# Altium PCB hot_board.PcbDoc
Units mm, origin at the board's own origin, x right, y up, seen from the top; angles counter-clockwise.
Board outline 74 x 58.5 mm, 2 copper layers (Top Layer, Bottom Layer), stack 1.579 mm thick; 50 components, 30 nets, 168 pads, 16 vias.
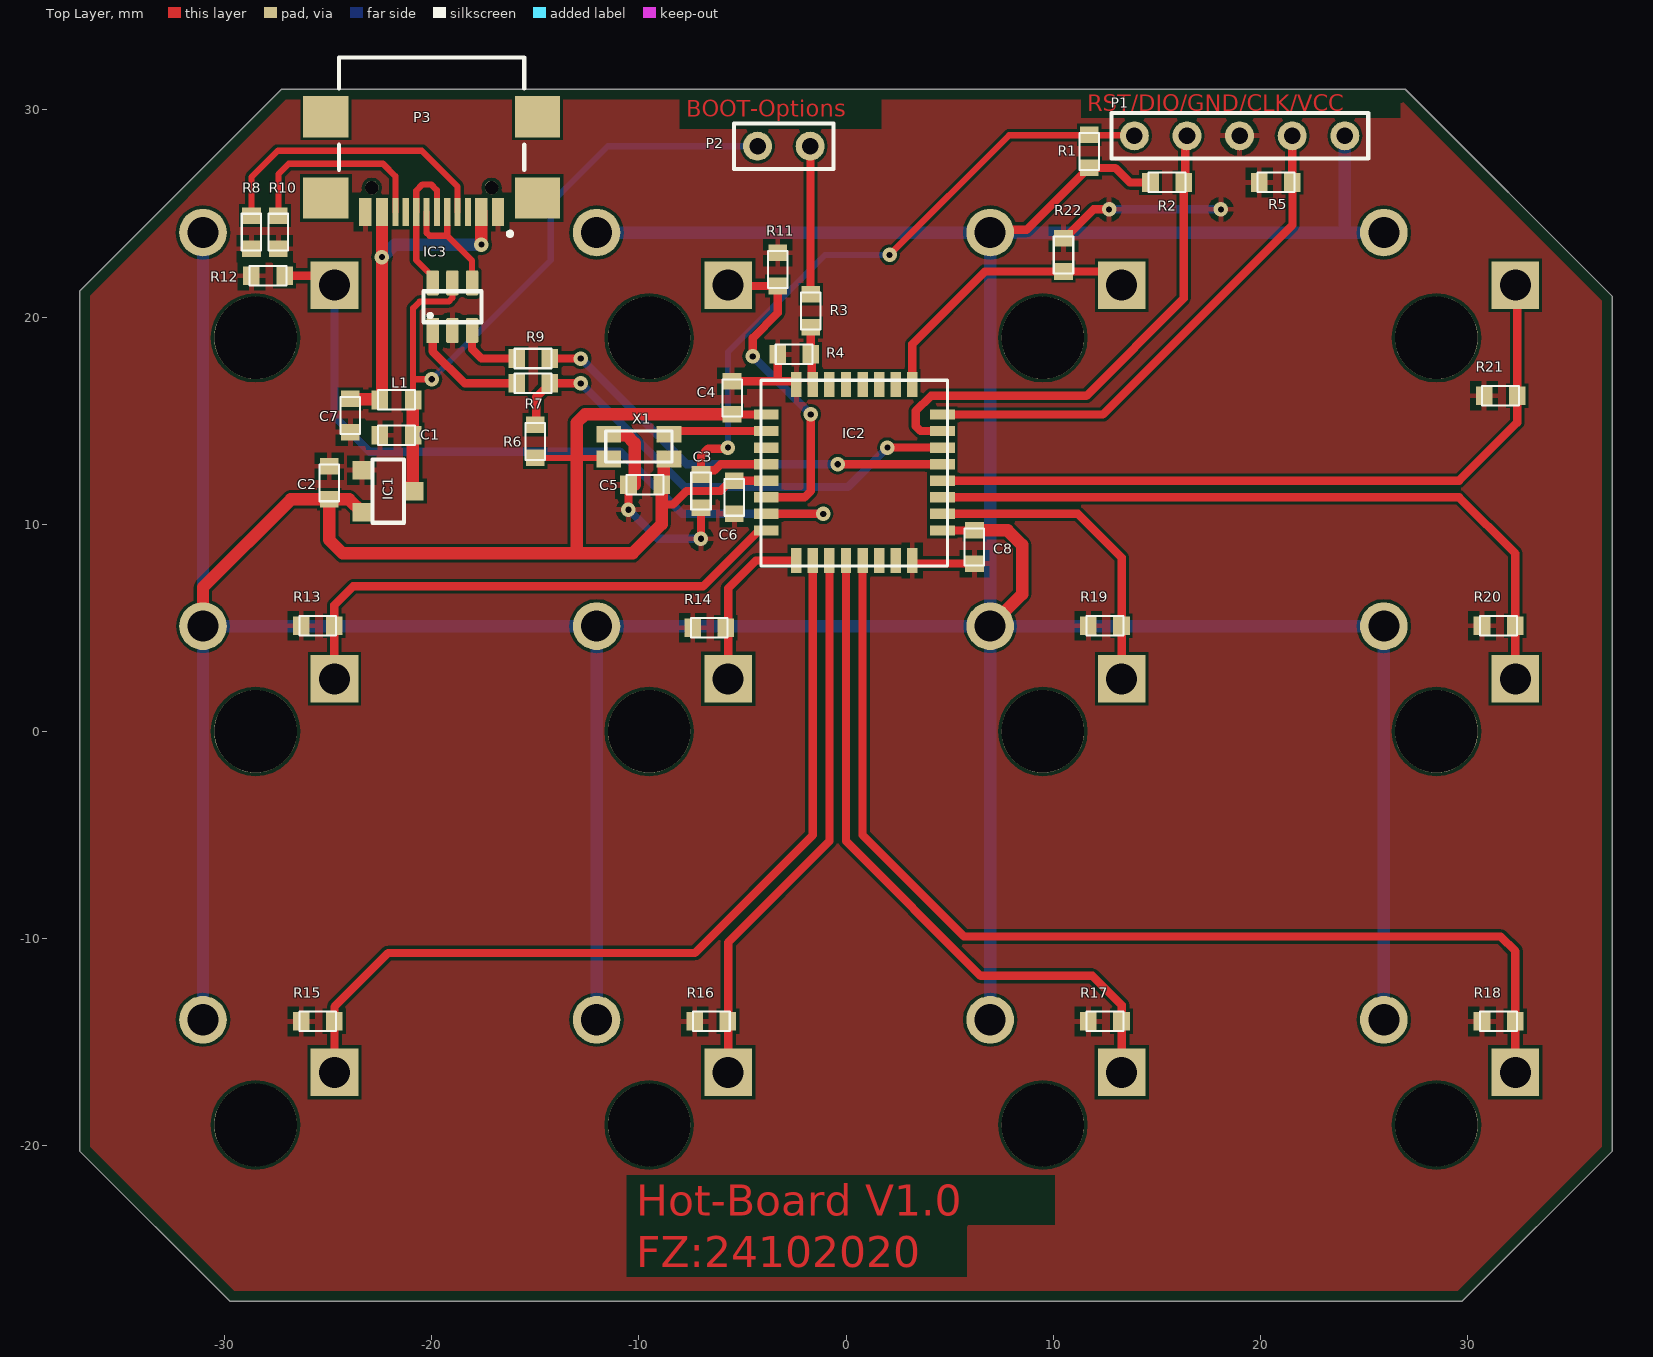
[diagram p0: Top Layer view]
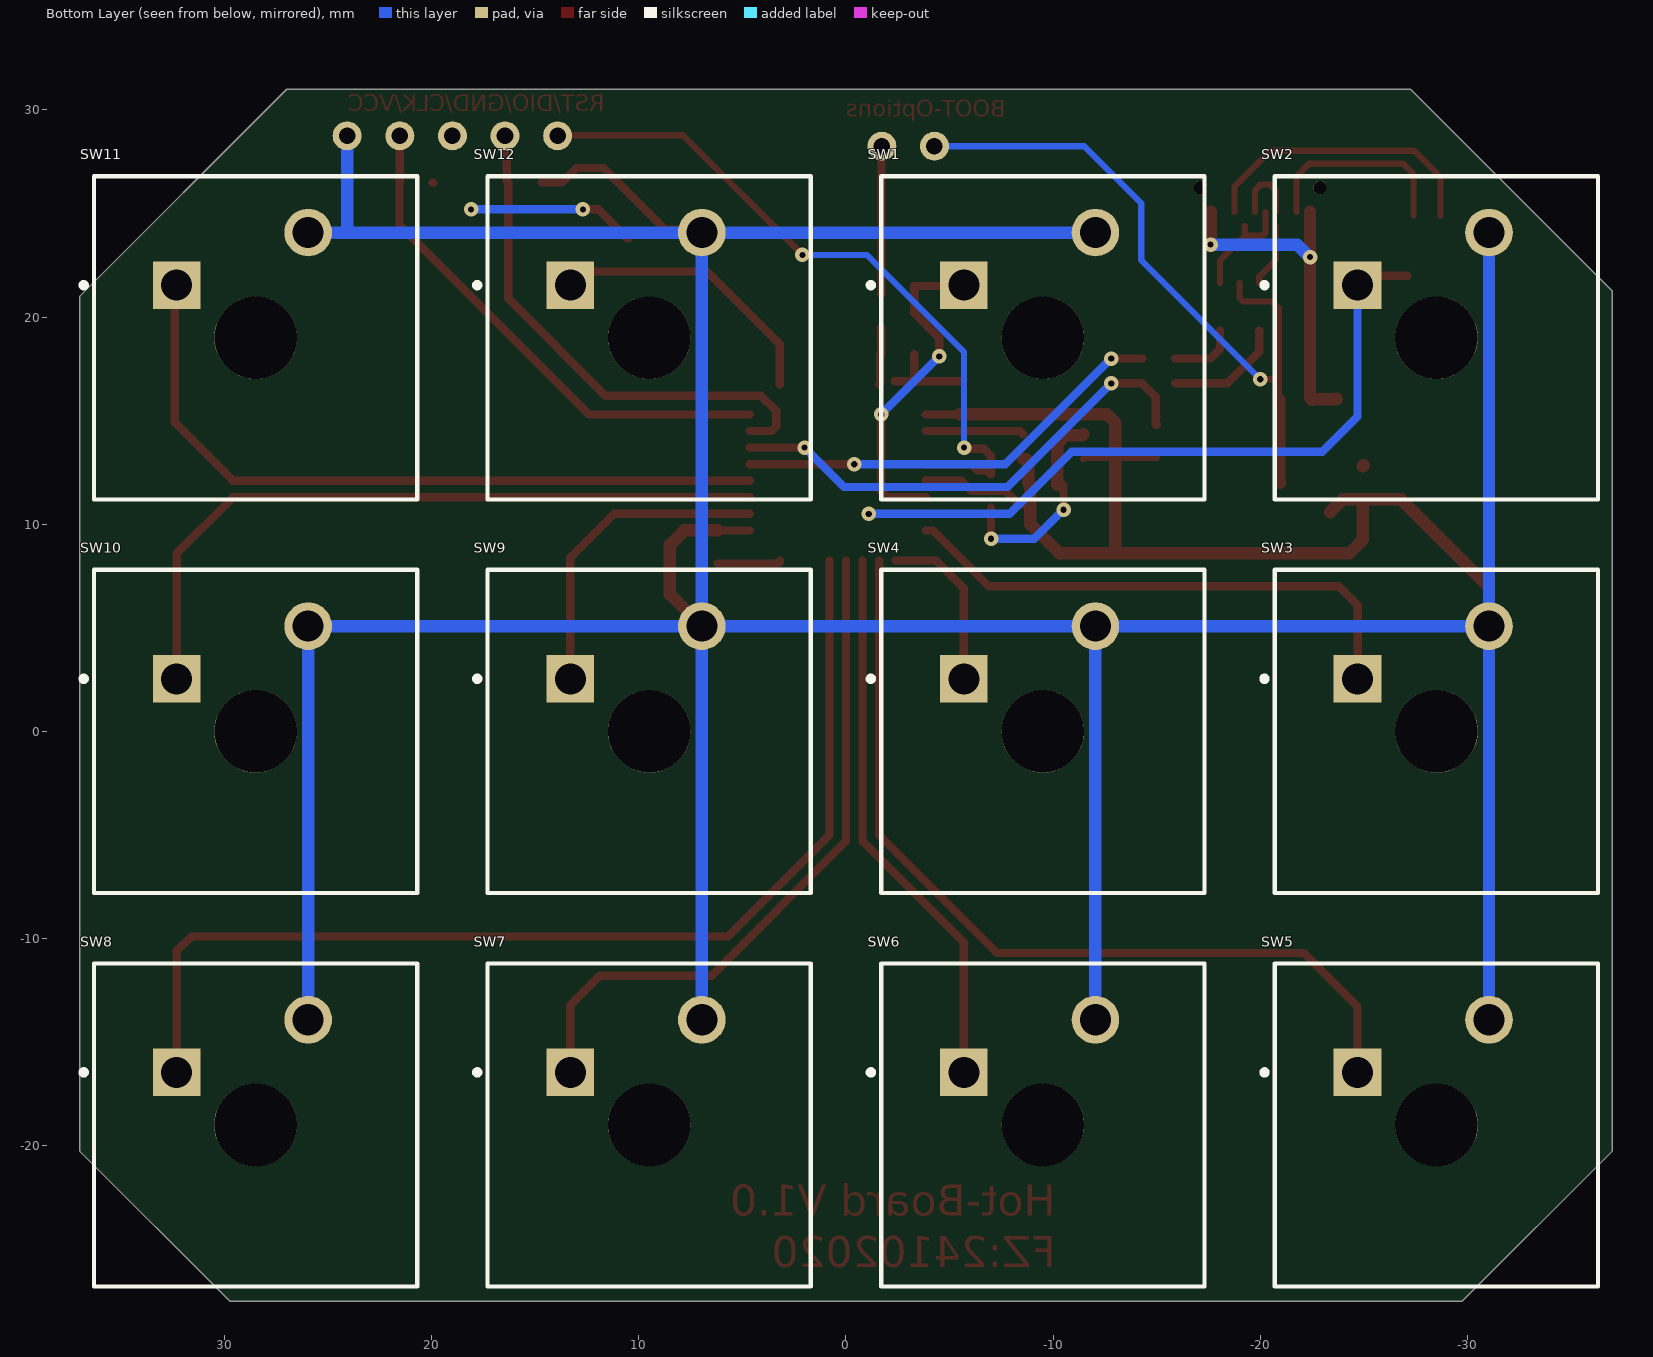
[diagram p1: Bottom Layer view, seen from below]
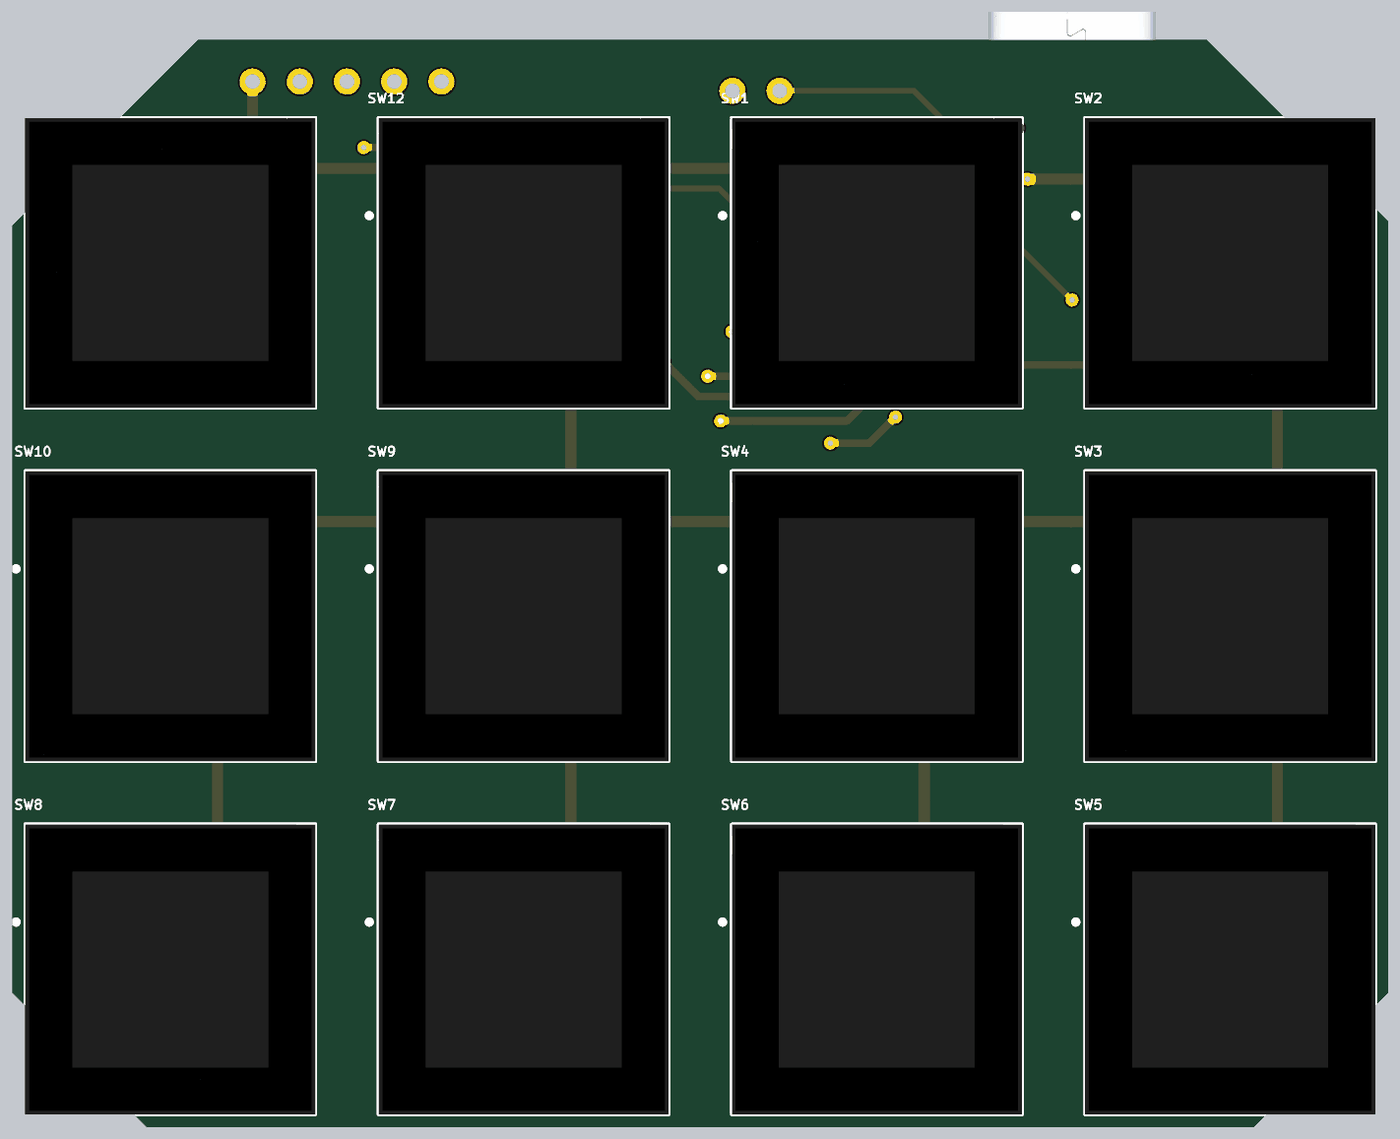
[diagram p2: 3D render of the assembled board from below, using the file's embedded part models]

## Layer stack, top to bottom
Top Solder: solder mask 0.0102, Solder Resist, Dk 3.5
Top Layer: signal copper 0.0356
Dielectric 1: dielectric 1.508, FR-4, Dk 4.8
Bottom Layer: signal copper 0.0356
Bottom Solder: solder mask 0.0102, Solder Resist, Dk 3.5

## Board outline
-37,-20.25 -29.75,-27.5 29.75,-27.5 37,-20.25 37,21 27,31 -27.25,31 -37,21.25

## Design rules (kind name [scope] priority, off if disabled: settings)
BoardOutlineClearance [All] p1: gap=0 ignorepadtopadclearanceinfootprint=FALSE except(0.5: Poly-OutlineEdge)
Clearance [All] p1: gap=0.15 ignorepadtopadclearanceinfootprint=FALSE
HoleSize [All] p1: absolutevalues=TRUE maxlimit=6.4 minlimit=0.3 maxpercent=80.000 minpercent=20.000
PolygonConnect [All] p1: connectstyle=Relief reliefconductorwidth=0.254 reliefentries=4 polygonreliefangle="90 Angle" airgapwidth=0.254
RoutingVias [All] p1: holewidth=0.3 width=0.7 viastyle="Through Hole" minholewidth=0.3 minwidth=0.7 maxholewidth=0.3 maxwidth=0.7
SilkToSilkClearance [All] p1: silktosilkclearance=0.2
SilkToSolderMaskClearance [IsPad] p1: minsilkscreentomaskgap=0.2 clearancetoexposedcopper=TRUE
SolderMaskExpansion [All] p1: expansion=0.102
Width [All] p1: maxlimit=0.6 minlimit=0.3 preferedwidth=0.4
27 further rules are at their usual default settings.

## Components (designator, comment, footprint, x,y, rotation, side; value= is the part's Value field where it differs from the comment)
C1 "1uF/25V" 0603 -21.7,14.3 r180 top
C2 "1uF/25V" 0603 -24.95,12 r90 top
C3 "100nF/50V" 0603 -7,11.6 r90 top
C4 "100nF/50V" 0603 -5.5,16.1 r270 top
C5 "100nF/50V" 0603 -9.7,11.9 r0 top
C6 "100nF/50V" 0603 -5.4,11.3 r90 top
C7 "1uF/25V" 0603 -23.925,15.25 r270 top
C8 "100nF/50V" 0603 6.2,8.9 r90 top
IC1 "AP2138N-3.3" SOT23-3 -22.1,11.6 r270 top
IC2 "STM32L412KBT6" LQFP-32 0.4,12.5 r0 top locked
IC3 "USBLC6-2SC6" SOT23-6 -19,20.5 r0 top
L1 "EMI-Filter 600R 0.5A 0603" 0603 -21.7,16 r180 top
P1 "1x5Pol. Header" "1x5 Header" 19,28.75 r180 top
P2 "Jumper" "1x2 Header" -3,28.25 r180 top
P3 "USB4105-GF-A" USB_SMD -20,26.25 r180 top locked
R1 "47K" 0603 11.75,28 r270 top
R2 "100K" 0603 15.5,26.5 r180 top
R3 "51K" 0603 -1.7,20.3 r90 top
R4 "100K" 0603 -2.5,18.2 r0 top
R5 "100K" 0603 20.75,26.5 r0 top
R6 "1K5" 0603 -15,14 r90 top
R7 "10R" 0603 -15.1,16.8 r180 top
R8 "5K1" 0603 -28.7,24.1 r90 top
R9 "10R" 0603 -15.1,18 r180 top
R10 "5K1" 0603 -27.4,24.1 r90 top
R11 "10K" 0603 -3.3,22.3 r90 top
R12 "10K" 0603 -27.9,22 r180 top
R13 "10K" 0603 -25.5,5.1 r180 top
R14 "10K" 0603 -6.6,5 r180 top
R15 "10K" 0603 -25.5,-14 r180 top
R16 "10K" 0603 -6.5,-14 r180 top
R17 "10K" 0603 12.5,-14 r180 top
R18 "10K" 0603 31.5,-14 r180 top
R19 "10K" 0603 12.5,5.1 r180 top
R20 "10K" 0603 31.5,5.1 r180 top
R21 "10K" 0603 31.6,16.2 r180 top
R22 "10K" 0603 10.5,23 r90 top
SW1 "Switch_Cherry_MX1A-E1NN_eec" CHERRY_MX1A-E1NN_0 -9.5,19 r180 bottom locked
SW2 "Switch_Cherry_MX1A-E1NN_eec" CHERRY_MX1A-E1NN_0 -28.5,19 r180 bottom locked
SW3 "Switch_Cherry_MX1A-E1NN_eec" CHERRY_MX1A-E1NN_0 -28.5,0 r180 bottom locked
SW4 "Switch_Cherry_MX1A-E1NN_eec" CHERRY_MX1A-E1NN_0 -9.5,0 r180 bottom locked
SW5 "Switch_Cherry_MX1A-E1NN_eec" CHERRY_MX1A-E1NN_0 -28.5,-19 r180 bottom locked
SW6 "Switch_Cherry_MX1A-E1NN_eec" CHERRY_MX1A-E1NN_0 -9.5,-19 r180 bottom locked
SW7 "Switch_Cherry_MX1A-E1NN_eec" CHERRY_MX1A-E1NN_0 9.5,-19 r180 bottom locked
SW8 "Switch_Cherry_MX1A-E1NN_eec" CHERRY_MX1A-E1NN_0 28.5,-19 r180 bottom locked
SW9 "Switch_Cherry_MX1A-E1NN_eec" CHERRY_MX1A-E1NN_0 9.5,0 r180 bottom locked
SW10 "Switch_Cherry_MX1A-E1NN_eec" CHERRY_MX1A-E1NN_0 28.5,0 r180 bottom locked
SW11 "Switch_Cherry_MX1A-E1NN_eec" CHERRY_MX1A-E1NN_0 28.5,19 r180 bottom locked
SW12 "Switch_Cherry_MX1A-E1NN_eec" CHERRY_MX1A-E1NN_0 9.5,19 r180 bottom locked
X1 "32.768kHz" Quartz -10,13.75 r180 top

## Footprints (in the part's own frame and the unit in brackets; to place one, negate y for a bottom-side part, rotate by r counter-clockwise, add the part's x,y. Pads: shape width x height; smd on the part's side, far side on the other; paste and mask are expansions set on the pad)
"1x2 Header" [mm] "SIP; 2 Leads; Body 4.8 x 2.2 x 10.6 mm (typ); Pitch 2.54 mm"
  round 1.4 hole 0.8: 1(-1.27,0) 2(1.27,0)
  silkscreen extent -2.4,-1.1 2.4,1.1
"1x5 Header" [mm] "SIP; 2 Leads; Body 4.8 x 2.2 x 10.6 mm (typ); Pitch 2.54 mm"
  round 1.4 hole 0.8: 1(-5.08,0) 2(-2.54,0) 3(0,0) 4(2.54,0) 5(5.08,0)
  silkscreen extent -6.21,-1.1 6.19,1.1
0603 [mm]
  rect 0.8x0.9 smd: 1(-0.8,0) 2(0.8,0)
  silkscreen extent -0.89,-0.47 0.89,0.47, body extent -0.89,-0.47 0.89,0.47, height 0.38
CHERRY_MX1A-E1NN_0 [mil]
  rect 90.5x90.5 hole 59 paste-39370.1 mask+0: 1(-150,100)
  round 90.5 hole 59 paste-39370.1 mask+0: 2(100,200)
  round 157 hole 157 unplated paste-39370.1 mask+0: ""(0,0)
  silkscreen extent -332,-307 307,307, body extent -307,-307 307,307, height 598
LQFP-32 [mm]
  rect 1.2x0.5 smd: 1(-4.25,2.8) 2(-4.25,2) 3(-4.25,1.2) 4(-4.25,0.4) 5(-4.25,-0.4) 6(-4.25,-1.2) 7(-4.25,-2) 8(-4.25,-2.8) 17(4.25,-2.8) 18(4.25,-2) 19(4.25,-1.2) 20(4.25,-0.4) 21(4.25,0.4) 22(4.25,1.2) 23(4.25,2) 24(4.25,2.8)
  rect 0.5x1.2 smd: 9(-2.8,-4.25) 10(-2,-4.25) 11(-1.2,-4.25) 12(-0.4,-4.25) 13(0.4,-4.25) 14(1.2,-4.25) 15(2,-4.25) 16(2.8,-4.25) 25(2.8,4.25) 26(2,4.25) 27(1.2,4.25) 28(0.4,4.25) 29(-0.4,4.25) 30(-1.2,4.25) 31(-2,4.25) 32(-2.8,4.25)
  silkscreen extent -4.5,-4.53 4.5,4.45, body extent -4.5,-4.52 4.5,4.47, height 1.63
Quartz [mm]
  rect 1.2x0.8 smd: 1(-1.45,-0.6) 2(1.45,-0.6) 3(1.45,0.6) 4(-1.45,0.6)
  silkscreen extent -1.6,-0.75 1.6,0.75, body extent -1.58,-0.75 1.62,0.75, height 1
SOT23-3 [mil] "SOT-23; 3 Leads; Body 3.0 x 2.5 mm, inc. leads (LxW max)"
  rect 35x35 smd: 1(-40,-50) 2(40,-50) 3(0,50)
  silkscreen extent -60,-30 60,30
SOT23-6 [mm] "SOT-23; 3 Leads; Body 3.0 x 2.5 mm, inc. leads (LxW max)"
  rect 0.6x1.2 smd mask+0.05: 1(-0.95,-1.15)
  rrect20% 0.6x1.2 smd mask+0.05: 2(0,-1.15) 3(0.95,-1.15) 4(0.95,1.15) 5(0,1.15) 6(-0.95,1.15)
  silkscreen extent -1.4,-0.75 1.4,0.75, body extent -1.4,-1.21 1.4,1.21, height 1.09
USB_SMD [mm]
  rect 0.6x1.35 smd: A1/B12(-3.2,1.175) A4/B9(-2.4,1.175) B1/A12(3.2,1.175) B4/A9(2.4,1.175)
  rect 0.3x1.35 smd: A5(-1.25,1.175) A6(-0.25,1.175) A7(0.25,1.175) A8(1.25,1.175) B5(1.75,1.175) B6(0.75,1.175) B7(-0.75,1.175) B8(-1.75,1.175)
  rect 2.18x2 smd: S1(-5.11,0.5) S2(5.11,0.5) S3(-5.11,-3.43) S4(5.11,-3.43)
  round 0.65 hole 0.65 unplated: ""(-2.89,0) ""(2.89,0)
  silkscreen extent -4.47,-6.28 4.47,2.33, body extent -5.65,-6.25 5.65,1.43, height 3.23

## Part data
C1 C2 C7: library part 1uF_0603_25V, "Keramikkondensator, 1uF, 25V, 10%, SMD 0603, X5R", Artikelnummer_FA=1735540, Artikelnummer_HEK=1280791, Artikelnummer_MOU=80-C0603C105K3PAC, Datum=03.10.2010, Dielektrikum=X5R, Hersteller=Kemet, Richtpreis_EURO=0.01
C3 C4 C5 C6 C8: library part 100nF_0603_50V, "Keramikkondensator, 100nF, 50V, 10%, SMD 0603, X7R", Artikelnummer_FA=1362556, Artikelnummer_HEK=1280316, Datum=08.06.06, HelpURL=http://hk79295n10/idmws/doccontent.dll?library=hekatron^hk79295n11&id=003751259, Richtpreis_EURO=0.0017
IC1: "PMIC - Spannungsregler - Linear 1 Ausgang 250mA SOT-23-3"
IC2: "Ultra-low-power with FPU Arm Cortex-M4 MCU 80 MHz with 128-Kbyte of Flash memory, USB"
IC3: "17V Klemme 5 A (8/20µs) Ipp TVS - Dioden Oberflächenmontage SOT-23-6"
L1: "Ferrit EMI Filter, 100MHz, 25%, 600 Ohm, 0.5A, SMD 0603", Artikelnummer_FA=1515723, Artikelnummer_HEK=1020415, Datum=10.06.12, Info="Murata: BLM18EG601SN1D", Richtpreis_EURO=0.0183
P1: library part SWD-Connector, "SWD Connector for Programming"
P2: "Header 1x2pol", Artikelnummer_HEK=2520674, HelpURL=http://dmshekatron.securiton.int/idmwsout/doccontent.dll?library=hekatron^hk79295n11&id=004881205, Richtpreis_EURO=0.2, SMD=N, System=Connector
P3: library part USB_C_Connector, "USB4105-GF-A? / USB2.0 TYPEC"
R1: library part 47K_0603_0.125W, "47K Chip-Widerstand, 1%, 0.125W, 0603", Artikelnummer_DIS=715628, Artikelnummer_FA=1576305, Artikelnummer_HEK=1191450, Datum=20.12.06, HelpURL=http://hk79295n10/idmws/doccontent.dll?library=hekatron^hk79295n11&id=004062332, Richtpreis_EURO=0.01
R2 R4 R5: library part 100K_0603_0.1W, "100K Chip-Widerstand, 1%, 0.063W, 0603", Artikelnummer_HEK=1190787, Datum=20.03.14, Richtpreis_EURO=0.0003
R3: library part 51K_0603_0.1W, "51K Chip-Widerstand, 1%. 0.1W, 0603", Artikelnummer_FA=1799349, Artikelnummer_HEK=1191872, Datum=14.05.10, HelpURL=http://hk79295n10/IDMWSout/doccontent.dll?library=hekatron^hk79295n11&id=004064519, Richtpreis_EURO=0.01
R6: library part 1K5_0603_0.100W, "1K5 Chip-Widerstand, 1%, 0.100W, 0603", Artikelnummer_HEK=1191340, Datum=20.03.14, Richtpreis_EURO=0.0004
R7 R9: library part 10R_0603_0.125W, "10R Chip-Widerstand, 1%, 0.125W, 0603", Artikelnummer_FA=1576250, Artikelnummer_HEK=1191543, Datum=26.04.06, Richtpreis_EURO=0.01
R8 R10: library part 5K1_0603_0.1W, "5K1 Chip-Widerstand, 1%. 0.1W, 0603", Artikelnummer_DIS=715605, Artikelnummer_HEK=1191429, Datum=26.04.06, Richtpreis_EURO=0.0004
R11 R12 R13 R14 R15 R16 R17 R18 R19 R20 R21 R22: library part 10K_0603_0.1W, "10K Chip-Widerstand, 1%, 0.1W, 0603", Artikelnummer_HEK=1190782, Datum=20.03.14, Richtpreis_EURO=0.0001
SW1 SW2 SW3 SW4 SW5 SW6 SW7 SW8 SW9 SW10 SW11 SW12: "SWITCH Pushbutton Switch SPST-NO Keyswitch Panel Mount, Front", Current="10mA AC/DC max. 10µA DC min.", Digikey Part Number=CH196-ND, Manufacturer=Cherry, Mouser Part Number=540-MX1A-E1NN, Package=SMT_SW_15MM6_15MM6, Part Number=MX1A-E1NN, Temperature="-10°C to +70°C", Temperature Range High=+70°C, Temperature Range Low=-10°C, Voltage="12 VAC/DC max. 2 VDC min.", Circuit=SPST-NO, ComponentLink1Description=Upverter, ComponentLink1URL=https://upverter.com/upn/revision/05edf2e9883387c2/, ComponentLink2Description=Datasheet, ComponentLink2URL=https://upverter.com/datasheet/a174b925b05052267a652262a41f429ea7a87855.pdf, Digikey Description="SWITCH Pushbutton Switch SPST-NO Keyswitch Panel Mount, Front", HelpURL=https://upverter.com/upn/revision/05edf2e9883387c2/, Lead Free=yes, Price=0.741007758432, RoHS=TRUE, Supplier 1=Digi-Key, Supplier 2=Mouser, Supplier Part Number 1=CH196-ND, Supplier Part Number 2=540-MX1A-E1NN
X1: library part Oszillator_32.765kHz, "32,768kHz CMOS XO-Norm Oszillator 1,2V bis 5,5V Aktivieren/Deaktivieren 4-SMD, ohne Anschlüsse"

## Via types
v1: diameter 0.7, hole 0.3, Top Layer to Bottom Layer, 16 vias

## Nets (pads, with @x,y where several pads share a name; then routed paths per layer and width w, separated by ;. In a path a pad name is that pad's centre, name@x,y a point inside that pad or via, vN(x,y) a via of type N, cw(c..) or ccw(c..) an arc to the next point about the centre after c; other vN are vias at no path point)
+3V3: C2.1 C4.2 C5.2 C6.2 C8.2 IC1.2 IC2.1 IC2.5 IC2.17 P1.1 R1.2 R2.2 R6.1 SW1.2 SW2.2 SW3.2 SW4.2 SW5.2 SW6.2 SW7.2 SW8.2 SW9.2 SW10.2 SW11.2 SW12.2 X1.3 X1.4 | length 290.1
  Top Layer w0.3: R6.1@-14.975,13.175 R6.1 -13,13.2 -11.5,13.2 X1.3
  Top Layer w0.4: -8.9,10.95 -8.35,10.95 -7.7,11.6 -6.05,11.6 -5.55,12.1 C6.2@-5.5,12.1 ; C4.2 IC2.1 ; C6.2 IC2.5 ; IC2.17 C8.2 ; SW12.2 7.089,24.209 8.709,24.209 11.7,27.2 R1.2 13,27.2 13.7,26.5 R2.2
  Top Layer w0.6: SW3.2 -31.04,6.96 -26.8,11.2 C2.1 ; IC1.2 -23.986,11.2 C2.1 ; X1.4 -8.7,13.15 -8.8,13.05 -8.8,12 C5.2 -8.9,10.95 -8.9,10 -10.3,8.6 -13,8.6 ; C4.2 -12.6,15.3 -13,14.9 -13,13.2 -13,8.6 ; C8.2 7.8,9.7 8.5,9 8.5,6.62 SW9.2 ; C2.1 -24.95,9.25 -24.3,8.6 -13,8.6
  Bottom Layer w0.6: SW5.2 SW3.2 ; SW2.2 SW3.2 ; SW6.2 SW4.2 ; SW1.2 SW12.2 ; SW7.2 SW9.2 ; P1.1 24.08,24.1 24.1,24.08 ; SW8.2 SW10.2 SW9.2 ; SW11.2 24.1,24.08 ; SW3.2 SW4.2 ; SW4.2 SW9.2 ; SW9.2 SW12.2 ; SW12.2 24.1,24.08
+VUSB: C1.1 IC1.3 IC3.5 L1.1 P2.2 | length 34.2
  Top Layer w0.3: L1.1 -20.9,17 ; v1(-20,17) -20.9,17 ; IC3.5 -19,20.926 -19.176,20.75 -20.574,20.75 -20.9,20.424 -20.9,17
  Top Layer w0.6: IC1.3@-20.93,12 -20.915,12.015 -20.915,15.985 L1.1
  Bottom Layer w0.3: v1(-20,17) -14.25,22.75 -14.25,25.5 -11.5,28.25 P2.2
GND: C1.2 C2.2 C3.1 C4.1 C5.1 C6.1 C7.2 C8.1 IC1.1 IC2.16 IC2.32 IC3.2 P1.3 P3.A1/B12 P3.B1/A12 R4.1 R5.1 R8.1 R10.1 R11.2 R12.2 R13.2 R14.2 R15.2 R16.2 R17.2 R18.2 R19.2 R20.2 R21.2 R22.2 X1.2 | length 26.1
  Top Layer w0.4: v1(-10.5,10.7) C5.1 ; v1(-7,9.3) C3.1 ; C4.1 -3.4,16.9 ; R4.1 -3.3,17 -3.4,16.9 ; IC2.32@-2.35,16.9 -3.4,16.9 ; IC2.16 3.2,8.15 3.25,8.1 C8.1 ; R22.2 10.55,23.8 11.95,25.2 v1(12.7,25.2) ; R5.1@19.925,26.475 R5.1
  Top Layer w0.6: C2.2@-25,12.85 C2.2 ; X1.2 -11.4,14.3 -10.6,14.3 -10.2,13.9 C5.1@-10.2,11.9
  Bottom Layer w0.4: v1(-10.5,10.7) -9.1,9.3 v1(-7,9.3) ; v1(12.7,25.2) v1(18.1,25.2)
NetC3_2: C3.2 IC2.4 P1.5 R1.1 | length 34.3
  Top Layer w0.3: v1(2.1,23) 7.875,28.775 13.895,28.775 P1.5
  Top Layer w0.4: v1(-5.7,13.7) -5.75,13.65 -6.65,13.65 -7,13.3 C3.2 -6.8,12.6 -6.345,12.6 -6.045,12.9 IC2.4
  Bottom Layer w0.3: v1(-5.7,13.7) -5.7,18.3 -1,23 v1(2.1,23)
NetC7_1: C7.1 L1.2 P3.A4/B9 P3.B4/A9 | length 17
  Top Layer w0.6: C7.1@-23.7,16.05 -23.675,16.025 -22.525,16.025 L1.2 -22.4,16.1 v1(-22.4,22.9) P3.B4/A9 ; v1(-17.6,23.5) P3.A4/B9
  Bottom Layer w0.6: v1(-22.4,22.9) -22.373,22.9 -21.773,23.5 v1(-17.6,23.5)
NetIC2_2: IC2.2 X1.1 | length 4.8
  Top Layer w0.4: X1.1 -8.4,14.5 IC2.2
NetIC2_21: IC2.21 R9.1 | length 21.1
  Top Layer w0.4: R9.1 v1(-12.8,18) ; v1(-0.4,12.9) IC2.21
  Bottom Layer w0.4: v1(-12.8,18) -7.7,12.9 v1(-0.4,12.9)
NetIC2_22: IC2.22 R6.2 R7.1 | length 24.1
  Top Layer w0.4: R6.2 -14.95,14.8 -14.95,16.15 R7.1 v1(-12.8,16.8) ; v1(2,13.7) IC2.22
  Bottom Layer w0.4: v1(-12.8,16.8) -7.8,11.8 0.1,11.8 v1(2,13.7)
NetIC2_23: IC2.23 P1.4 R2.1 | length 25.2
  Top Layer w0.4: IC2.23 3.6,14.5 3.366,14.734 3.366,15.466 4.1,16.2 11.6,16.2 16.3,20.9 R2.1 16.38,26.58 16.38,28.67 P1.4
NetIC2_24: IC2.24 P1.2 R5.2 | length 25
  Top Layer w0.4: IC2.24 12.4,15.3 21.55,24.45 R5.2 21.545,26.505 21.545,28.745 P1.2
NetIC2_31: IC2.31 R3.1 R4.2 | length 2.9
  Top Layer w0.4: R4.2 R4.2@-1.7,18.3 ; R3.1@-1.675,19.475 R3.1 R4.2@-1.7,18.3 ; IC2.31 -1.65,16.8 -1.65,18.25 R4.2@-1.7,18.3
NetIC3_1: IC3.1 R7.2 | length 5.7
  Top Layer w0.4: IC3.1 -19.95,18.35 -18.4,16.8 R7.2
NetIC3_3: IC3.3 R9.2 | length 3.2
  Top Layer w0.4: IC3.3 -18.05,18.45 -17.6,18 R9.2
NetIC3_4: IC3.4 P3.A7 P3.B7 | length 5.3
  Top Layer w0.3: P3.A7 -20.25,24.075 -20.1,23.925 -19.25,23.925 ; -19.25,24.395 -19.25,23.925 ; IC3.4 -18.05,22.725 -19.25,23.925
NetIC3_6: IC3.6 P3.A6 P3.B6 | length 6.5
  Top Layer w0.3: -20.75,24.395 -20.75,22.75 -19.95,21.95 IC3.6 IC3.6@-20,21.7 ; P3.B6 -20.75,26.1 -20.45,26.4 -20.025,26.4 -19.75,26.125 P3.A6
NetP2_1: P2.1 R3.2 | length 7.2
  Top Layer w0.4: P2.1 -1.74,28.24 -1.715,28.215 -1.715,21.115 R3.2
NetP3_A5: P3.A5 R8.2 | length 14.3
  Top Layer w0.3: R8.2 -28.7,26.75 -27.425,28.025 -20.475,28.025 -18.75,26.3 P3.A5
NetP3_B5: P3.B5 R10.2 | length 9.8
  Top Layer w0.3: R10.2 -27.4,26.9 -26.9,27.4 -22.35,27.4 -21.75,26.8 P3.B5
SW0: IC2.6 R11.1 SW1.1 | length 16.2
  Top Layer w0.4: SW1.1 -5.65,21.5 R11.1 -3.3,20.2 -4.5,19 v1(-4.5,18.1) ; IC2.6 -2,11.3 -1.7,11.6 v1(-1.7,15.3)
  Bottom Layer w0.4: v1(-4.5,18.1) v1(-1.7,15.3)
SW1: IC2.7 R12.1 SW2.1 | length 37.2
  Top Layer w0.4: R12.1 -25.15,22 SW2.1 ; IC2.7 v1(-1.1,10.5)
  Bottom Layer w0.4: SW2.1 -24.69,15.19 -23,13.5 -10.9,13.5 -7.9,10.5 v1(-1.1,10.5)
SW2: IC2.8 R13.1 SW3.1 | length 25.9
  Top Layer w0.4: SW3.1 -24.7,2.55 R13.1 -24.7,6.1 -23.8,7 -6.9,7 -4.2,9.7 IC2.8
SW3: IC2.9 R14.1 SW4.1 | length 8.2
  Top Layer w0.4: SW4.1 -5.69,6.91 -4.35,8.25 IC2.9
SW4: IC2.10 R15.1 SW5.1 | length 42.9
  Top Layer w0.4: SW5.1 -24.69,-13.29 -22.1,-10.7 -7.3,-10.7 -1.6,-5 IC2.10
SW5: IC2.11 R16.1 SW6.1 | length 26.7
  Top Layer w0.4: SW6.1 -5.69,-10.19 -0.8,-5.3 IC2.11
SW6: IC2.12 R17.1 SW7.1 | length 33.4
  Top Layer w0.4: IC2.12 0,-5.3 6.5,-11.8 11.9,-11.8 13.31,-13.21 SW7.1
SW7: IC2.13 R18.1 SW8.1 | length 52.9
  Top Layer w0.4: IC2.13 0.8,-5 5.7,-9.9 31.6,-9.9 32.31,-10.61 SW8.1
SW8: IC2.18 R19.1 SW9.1 | length 15.4
  Top Layer w0.4: IC2.18 11.2,10.5 13.31,8.39 SW9.1
SW9: IC2.19 R20.1 SW10.1 | length 34.8
  Top Layer w0.4: IC2.19 29.6,11.3 32.31,8.59 SW10.1
SW10: IC2.20 R21.1 SW11.1 | length 35.6
  Top Layer w0.4: IC2.20 29.6,12.1 32.4,14.9 R21.1 32.4,21.45 SW11.1
SW11: IC2.25 R22.1 SW12.1 | length 13.8
  Top Layer w0.4: IC2.25 3.2,18.7 6.7,22.2 R22.1 12.65,22.2 SW12.1
pads on no net: IC2.3 IC2.14 IC2.15 IC2.26 IC2.27 IC2.28 IC2.29 IC2.30 P3. P3.A8 P3.B8 P3.S1 P3.S2 P3.S3 P3.S4 SW1. SW2. SW3. SW4. SW5. SW6. SW7. SW8. SW9. SW10. SW11. SW12.

## Polygon pours and split planes (outlines as drawn)
GND on Top Layer "Top Layer-GND" (solid, remove dead copper, pour order 6): -37,-20.25 -29.75,-27.5 29.75,-27.5 37,-20.25 37,21 27,31 -27.25,31 -37,21.25

## Other copper
Top Layer:
  text "RST/DIO/GND/CLK/VCC" at 11.65,29.925 h0.8
  text "BOOT-Options" at -7.7,29.675 h0.8
  text "Hot-Board V1.0" at -10.125,-23.375 h1.5
  text "FZ:24102020" at -10.125,-25.875 h1.5

## Silkscreen, mask and mechanical layers (free items; w line width, h text height)
Top Solder:
  text "RST/DIO/GND/CLK/VCC" at 11.65,29.925 h0.8
  text "BOOT-Options" at -7.7,29.675 h0.8
  text "Hot-Board V1.0" at -10.125,-23.375 h1.5
  text "FZ:24102020" at -10.125,-25.875 h1.5
Mechanical 1:
  the board outline again, w0.25